# EAGLE board Contador (EAGLE 9.7.0)

Size 248.56 x 98.13 mm. Coordinates in mm from the lower left corner, seen from the top.
Outline: 0,0 248.56,0 248.56,98.12 0,98.12 0,0
Copper layers (1*16): Top 0.035mm / dielectric 1.5mm / Bottom 0.035mm
Design rules "default": minimum track width 6mil, minimum drill 0.35mm, track to track 6mil, track to pad 6mil, pad to pad 6mil, via to via 6mil, smd to smd 6mil, copper to edge 40mil, drill to drill 6mil, minimum pad ring 10mil, minimum via ring 8mil, stop-mask expansion 4mil, vias tented up to drill 0mil, thermal gap 10mil

## Footprints (pad centres in the part's own frame; a part is rotated, then mirrored left to right if it is on the bottom)
LEDRD254W60D565H860B = drill 0.981 pad 1.581: 1 -1.27,0; 2 1.27,0
7SEG-13 = drill 0.813 long: 1 -5.08,-7.62; 2 -2.54,-7.62; 3 0,-7.62; 4 2.54,-7.62; 5 5.08,-7.62; 6 5.08,7.62; 7 2.54,7.62; 8 0,7.62; 9 -2.54,7.62; 10 -5.08,7.62
BATTERY-GENERIC = drill 1.118 pad 3.15 octagon: + 2.54,0; - -2.54,0
RESAD1016W63L850D250B = drill 0.83 pad 1.43: 1 -5.08,0; 2 5.08,0
DIP762W53P254L1969H508Q14B = drill 0.743 pad 1.343: 1 -3.81,7.62; 2 -3.81,5.08; 3 -3.81,2.54; 4 -3.81,0; 5 -3.81,-2.54; 6 -3.81,-5.08; 7 -3.81,-7.62; 8 3.81,-7.62; 9 3.81,-5.08; 10 3.81,-2.54; 11 3.81,0; 12 3.81,2.54; 13 3.81,5.08; 14 3.81,7.62
DIP762W53P254L1969H508Q16B = drill 0.743 pad 1.343: 1 -3.81,8.89; 2 -3.81,6.35; 3 -3.81,3.81; 4 -3.81,1.27; 5 -3.81,-1.27; 6 -3.81,-3.81; 7 -3.81,-6.35; 8 -3.81,-8.89; 9 3.81,-8.89; 10 3.81,-6.35; 11 3.81,-3.81; 12 3.81,-1.27; 13 3.81,1.27; 14 3.81,3.81; 15 3.81,6.35; 16 3.81,8.89

## Placement (x,y rotation side)
D1  RED  [LEDRD254W60D565H860B]  186.14,49.72 180 top
D2  RED  [LEDRD254W60D565H860B]  110.02,49.05 180 top
D3  RED  [LEDRD254W60D565H860B]  97.51,49.06 180 top
D4  RED  [LEDRD254W60D565H860B]  87.49,48.99 180 top
D5  RED  [LEDRD254W60D565H860B]  196.15,49.79 180 top
D6  RED  [LEDRD254W60D565H860B]  208.67,49.77 180 top
D7  RED  [LEDRD254W60D565H860B]  222.53,50.75 180 top
D8  RED  [LEDRD254W60D565H860B]  122.73,49.08 180 top
DIGIT1  7SEG-CK  [7SEG-13]  176.63,84.03 0 top
DIGIT2  7SEG-CK  [7SEG-13]  141.07,84.03 0 top
FUNC1  FUNCTION-GENERATOR  [BATTERY-GENERIC]  30.4,46.18 180 top
P1  BATTERYGENERIC  [BATTERY-GENERIC]  8.26,8.26 180 top
R1  330  [RESAD1016W63L850D250B]  121.46,44 90 top
R2  330  [RESAD1016W63L850D250B]  141.07,68.79 90 top
R3  330  [RESAD1016W63L850D250B]  108.75,43.97 90 top
R4  330  [RESAD1016W63L850D250B]  96.24,43.98 90 top
R5  330  [RESAD1016W63L850D250B]  86.22,43.91 90 top
R6  330  [RESAD1016W63L850D250B]  176.63,66.25 90 top
R7  330  [RESAD1016W63L850D250B]  184.97,42.86 90 top
R8  330  [RESAD1016W63L850D250B]  195.09,42.51 90 top
R9  330  [RESAD1016W63L850D250B]  207.71,42.8 90 top
R10  330  [RESAD1016W63L850D250B]  221.15,43.47 90 top
U1  74HC00_PDIP  [DIP762W53P254L1969H508Q14B]  134.19,11.72 90 top
U2  CD4511_PDIP  [DIP762W53P254L1969H508Q16B]  114.4,82.76 90 top
U3  74HC73_PDIP  [DIP762W53P254L1969H508Q14B]  85.93,11.72 90 top
U4  74HC73_PDIP  [DIP762W53P254L1969H508Q14B]  108.79,11.72 90 top
U6  CD4511_PDIP  [DIP762W53P254L1969H508Q16B]  198.22,82.76 90 top
U7  74HC73_PDIP  [DIP762W53P254L1969H508Q14B]  185.37,11.36 90 top
U8  74HC73_PDIP  [DIP762W53P254L1969H508Q14B]  208.23,11.36 90 top
U9  74HC00_PDIP  [DIP762W53P254L1969H508Q14B]  233.63,11.36 90 top

## Library data of the parts
D1-D8 = Tinkercad; CATEGORY: Opto-Electronic; SUB-CATEGORY: LED; VALUE: LED_RED
DIGIT1 DIGIT2 = Tinkercad; CATEGORY: Opto-Electronic; SUB-CATEGORY: Display; TYPE: 7-Segment
FUNC1 P1 R1-R10 U1-U4 U6-U9 = Tinkercad

## Nets
D1_C: D1.2 R7.2
D2_C: D2.2 R3.2
D3_C: D3.2 R4.2
D4_C: D4.2 R5.2
D5_C: D5.2 R8.2
D6_C: D6.2 R9.2
D7_C: D7.2 R10.2
D8_C: D8.2 R1.2
DIGIT1_CK1: DIGIT1.3 R6.2
DIGIT2_CK1: DIGIT2.3 R2.2
FUNC1+: FUNC1.+ U7.1
P1+: P1.+ U1.14 U2.3 U2.4 U2.16 U3.3 U3.4 U3.7 U3.10 U3.14 U4.3 U4.4 U4.7 U4.10 U4.14 U6.3 U6.4 U6.16 U7.3 U7.4 U7.7 U7.10 U7.14 U8.3 U8.4 U8.7 U8.10 U8.14 U9.14
P1-: FUNC1.- P1.- R1.1 R2.1 R3.1 R4.1 R5.1 R6.1 R7.1 R8.1 R9.1 R10.1 U1.7 U2.5 U2.8 U3.11 U4.11 U6.5 U6.8 U7.11 U8.11 U9.7
U1_1B: D3.1 U1.2 U2.2 U4.5 U4.12
U1_1Y: U1.1 U1.3 U3.2 U3.6 U4.2 U4.6
U2_A: DIGIT2.7 U2.13
U2_B: DIGIT2.6 U2.12
U2_C: DIGIT2.4 U2.11
U2_D: DIGIT2.2 U2.10
U2_E: DIGIT2.1 U2.9
U2_F: DIGIT2.9 U2.15
U2_G: DIGIT2.10 U2.14
U3_1Q: D8.1 U2.7 U3.5 U3.12
U4_2Q: D4.1 U2.6 U4.9
U4_CLK1: D2.1 U2.1 U3.9 U4.1
U6_A: DIGIT1.7 U6.13
U6_B: DIGIT1.6 U6.12
U6_C: DIGIT1.4 U6.11
U6_D: DIGIT1.2 U6.10
U6_E: DIGIT1.1 U6.9
U6_F: DIGIT1.9 U6.15
U6_G: DIGIT1.10 U6.14
U6_IB: D6.1 U6.1 U7.9 U8.1 U9.1
U7_CLK2: D7.1 U6.7 U7.5 U7.12
U7_R2: U7.2 U7.6 U8.2 U8.6 U9.3
U8_CLK2: D5.1 U6.2 U8.5 U8.12
U9_1B: D1.1 U3.1 U6.6 U8.9 U9.2

## Tracks (layer width: path | path; a pad name or v marks a point on that pad's centre or on a via)
D1_C  (1 unrouted)
D2_C  (1 unrouted)
D3_C  (1 unrouted)
D4_C  (1 unrouted)
D5_C  (1 unrouted)
D6_C  (1 unrouted)
D7_C  (1 unrouted)
D8_C  (1 unrouted)
DIGIT1_CK1  (1 unrouted)
DIGIT2_CK1  (1 unrouted)
FUNC1+  (1 unrouted)
P1+  (28 unrouted)
P1-  (21 unrouted)
U1_1B  (4 unrouted)
U1_1Y  (5 unrouted)
U2_A  (1 unrouted)
U2_B  (1 unrouted)
U2_C  (1 unrouted)
U2_D  (1 unrouted)
U2_E  (1 unrouted)
U2_F  (1 unrouted)
U2_G  (1 unrouted)
U3_1Q  (3 unrouted)
U4_2Q  (2 unrouted)
U4_CLK1  (3 unrouted)
U6_A  (1 unrouted)
U6_B  (1 unrouted)
U6_C  (1 unrouted)
U6_D  (1 unrouted)
U6_E  (1 unrouted)
U6_F  (1 unrouted)
U6_G  (1 unrouted)
U6_IB  (4 unrouted)
U7_CLK2  (3 unrouted)
U7_R2  (4 unrouted)
U8_CLK2  (3 unrouted)
U9_1B  (4 unrouted)